# EAGLE board le_grand_strum_stencil (EAGLE 6.6.0)
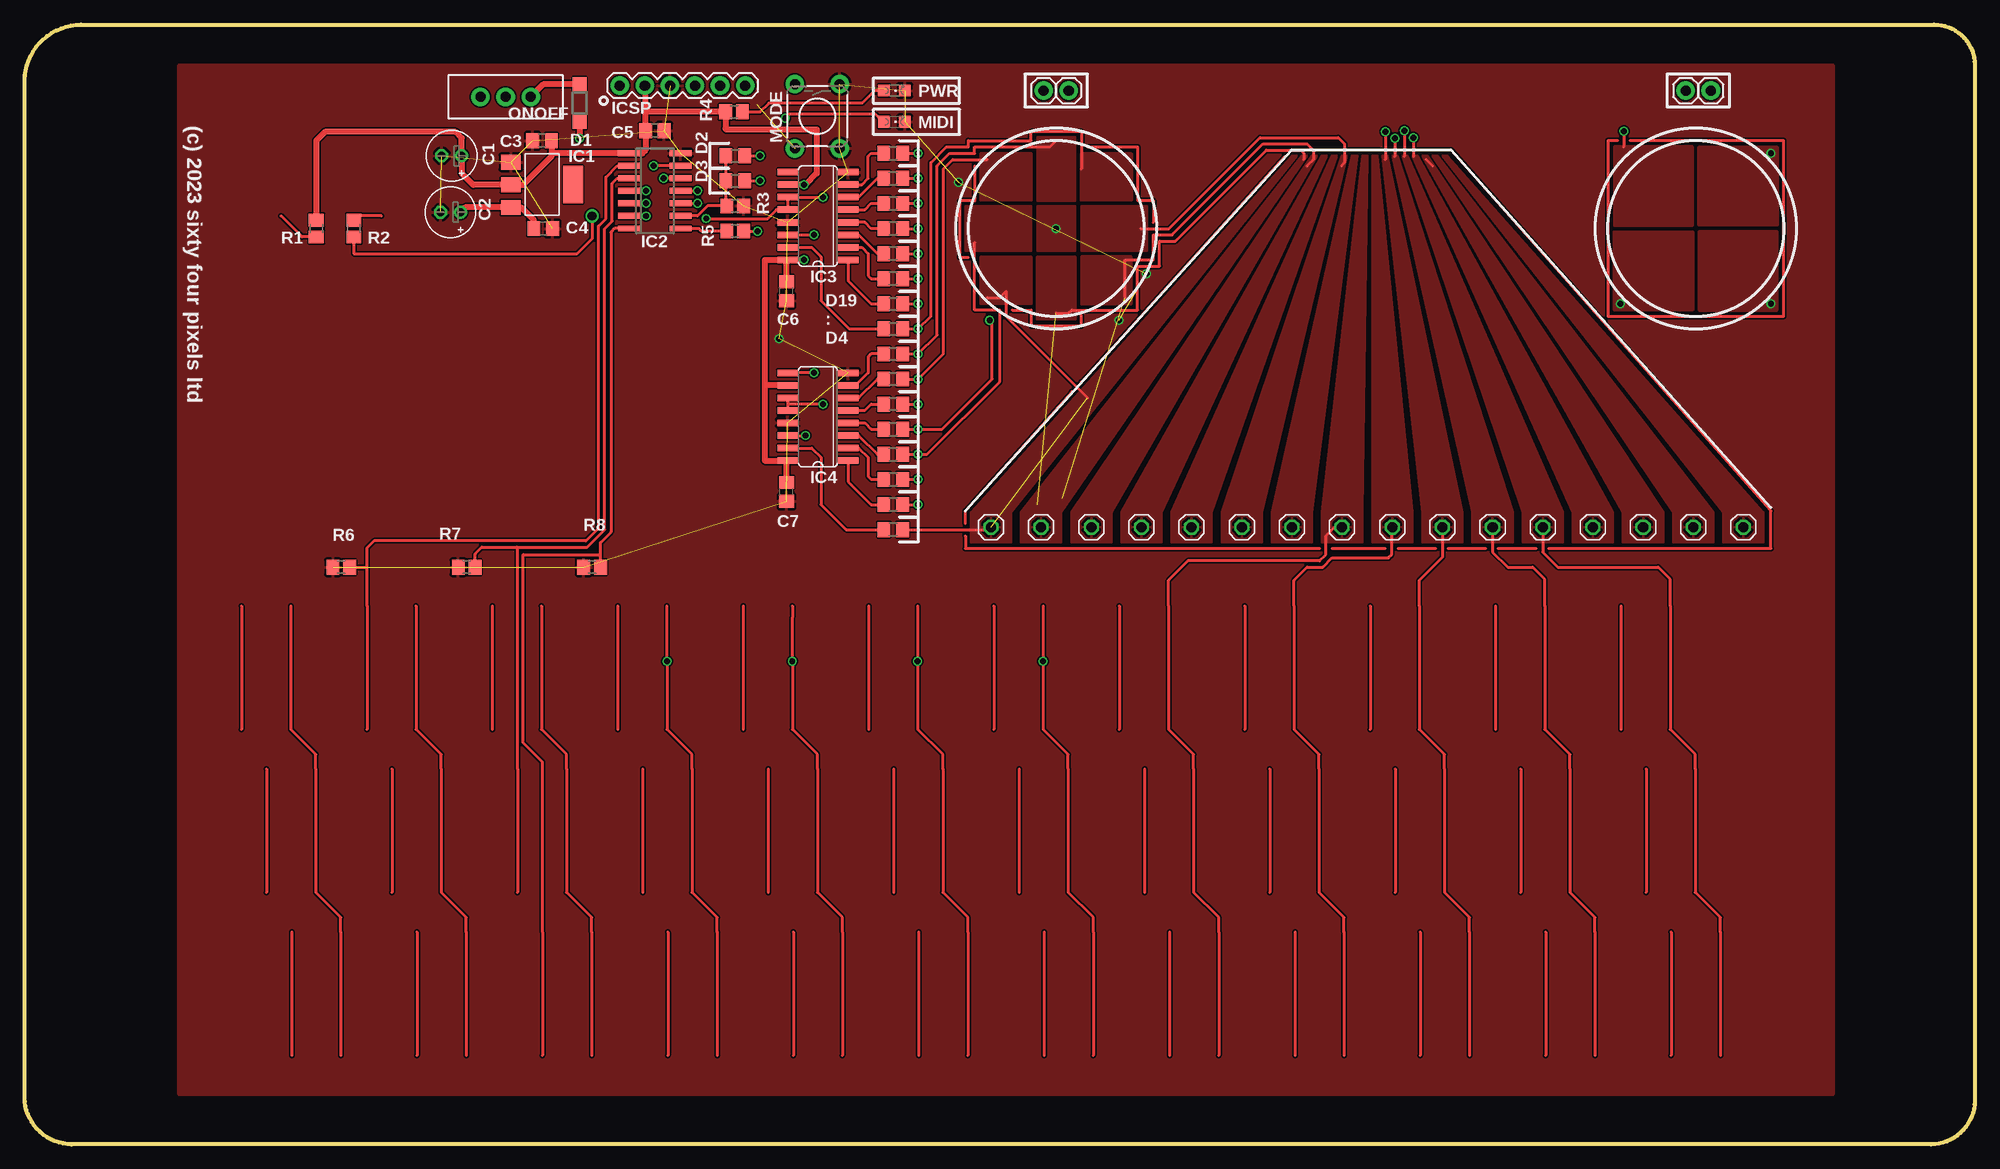
[diagram p0: board, top side]
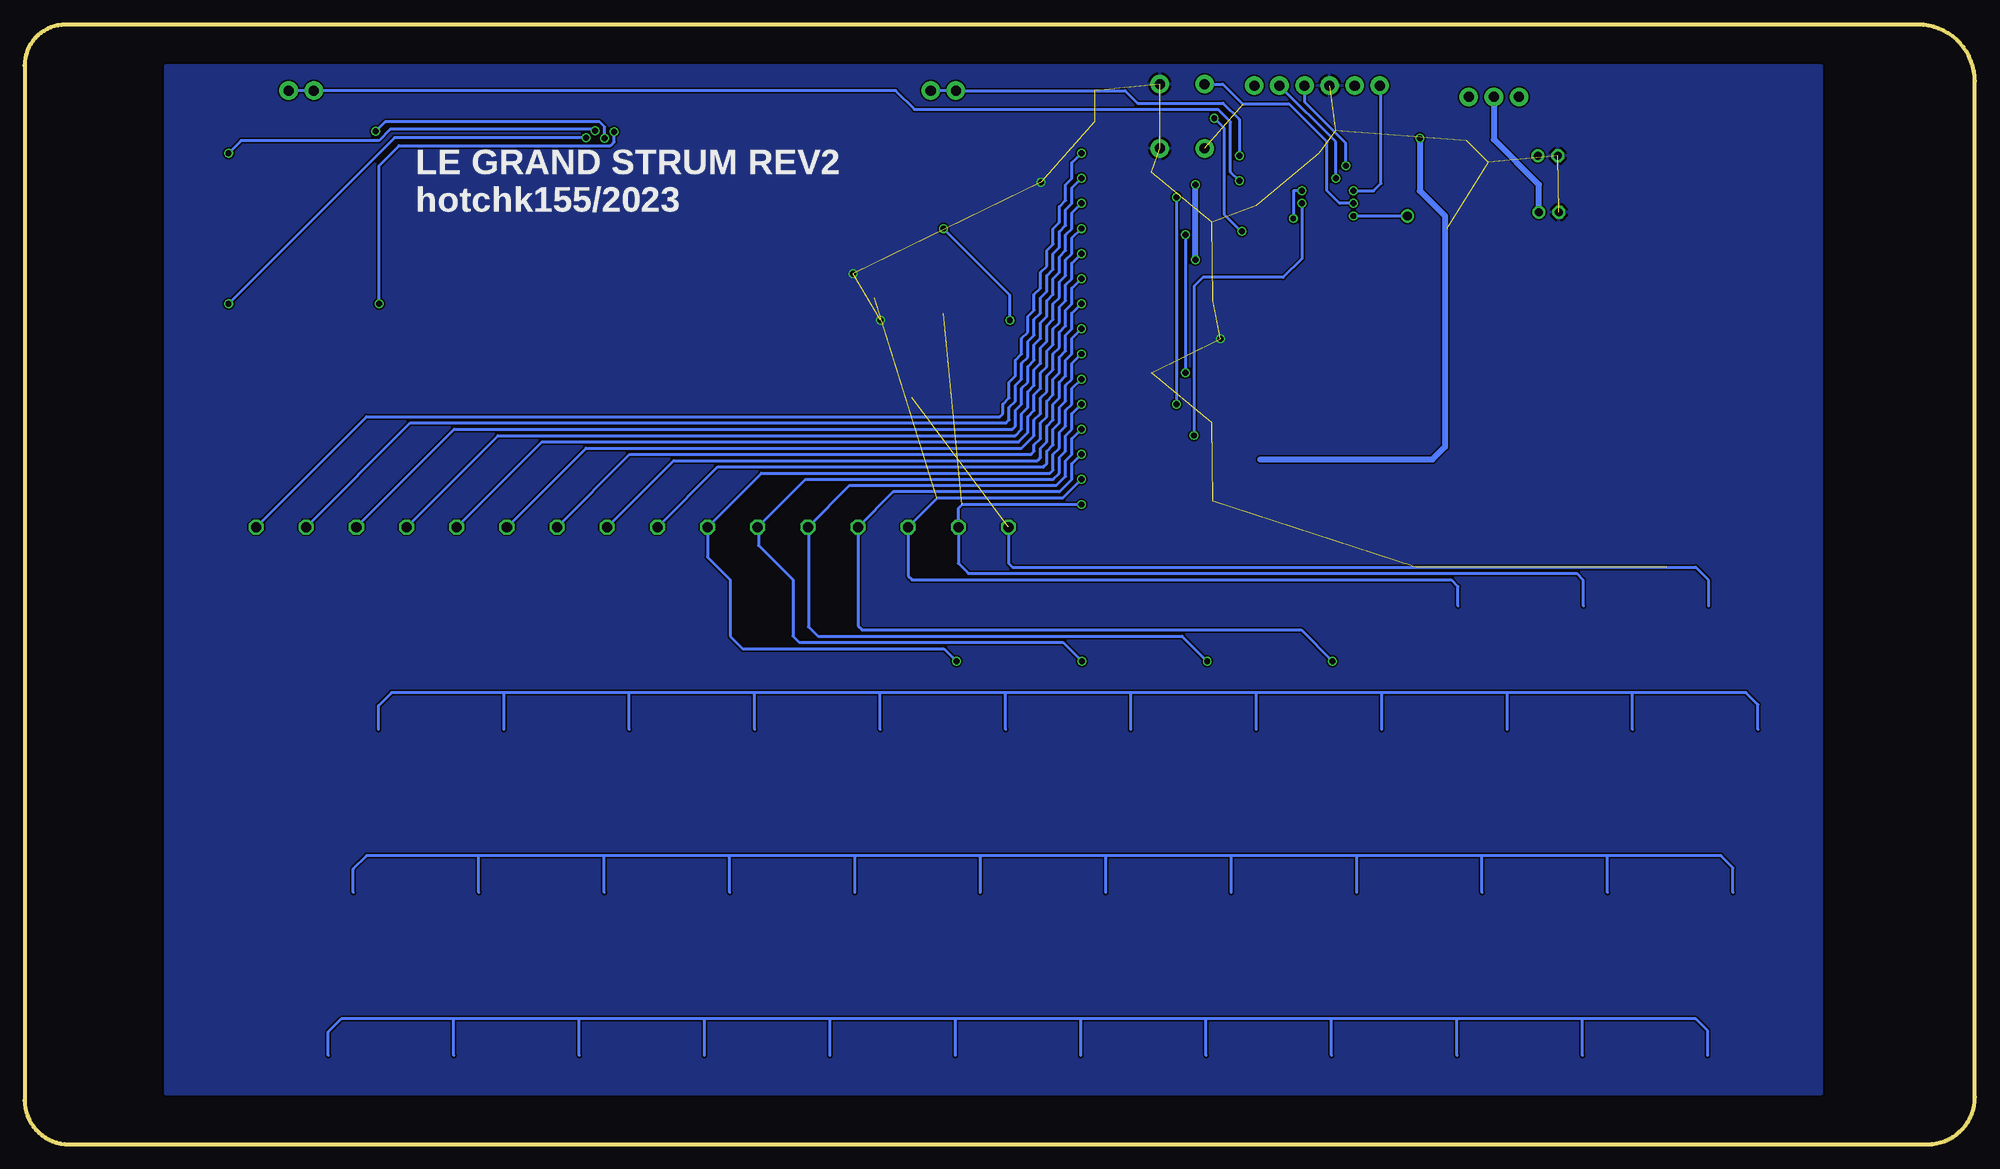
[diagram p1: board, bottom side, seen from below]

Size 197.49 x 113.35 mm. Coordinates in mm from the lower left corner, seen from the top.
Outline: 5.72,113.35 193.36,113.35 arc-90 197.49,109.22 197.49,4.45 arc-90 193.04,0 4.76,0 arc-90 0,4.76 0,107.63 arc-90 5.72,113.35
Copper layers (1*16): Top 0.035mm / dielectric 1.5mm / Bottom 0.035mm
Design rules "hackvana": minimum track width 6mil, minimum drill 0.3mm, track to track 6mil, track to pad 9mil, pad to pad 6mil, via to via 6mil, smd to smd 0mil, copper to edge 6mil, drill to drill 6mil, minimum pad ring 10mil, minimum via ring 6mil, stop-mask expansion 2mil, vias tented up to drill 100mil, thermal gap 10mil

## Footprints (pad centres in the part's own frame; a part is rotated, then mirrored left to right if it is on the bottom)
1X01 = drill 1.016 octagon: 1 0,0
E2-5 = drill 0.813 pad 1.27: + -1.016,0 | drill 0.813 pad 1.27 octagon: - 1.016,0
C0805 = smd 1.3 x 1.5: 1 -0.95,0; 2 0.95,0
SOD123 = smd 1.4 x 1.4: A 1.9,0; C -1.9,0
D0805 = smd 1.3 x 1.5: A -0.95,0; K 0.95,0
SOT223 = smd 1.499 x 2.007: 1 -2.261,-3.15; 2 0.025,-3.15; 3 2.311,-3.15 | smd 3.81 x 2.007: 4 0,3.15
SO14 = smd 0.6 x 2.2: 1 -3.81,-2.6; 2 -2.54,-2.6; 3 -1.27,-2.6; 4 0,-2.6; 5 1.27,-2.6; 6 2.54,-2.6; 7 3.81,-2.6; 8 3.81,2.6; 9 2.54,2.6; 10 1.27,2.6; 11 0,2.6; 12 -1.27,2.6; 13 -2.54,2.6; 14 -3.81,2.6
SO16 = smd 0.66 x 2.032: 1 -4.445,-3.073; 2 -3.175,-3.073; 3 -1.905,-3.073; 4 -0.635,-3.073; 5 0.635,-3.073; 6 1.905,-3.073; 7 3.175,-3.073; 8 4.445,-3.073; 9 4.445,3.073; 10 3.175,3.073; 11 1.905,3.073; 12 0.635,3.073; 13 -0.635,3.073; 14 -1.905,3.073; 15 -3.175,3.073; 16 -4.445,3.073
1X06 = drill 1.016 pad 1.88: 1 0,0; 2 2.54,0; 3 5.08,0; 4 7.62,0; 5 10.16,0; 6 12.7,0
CHIPLED_0805 = smd 1.2 x 1.2: A 0,-1.05; C 0,1.05
TACTILE-PTH = drill 1.016 pad 1.88: 1 -3.251,2.261; 2 3.251,2.261; 3 -3.251,-2.261; 4 3.251,-2.261
SWITCH-SPDT = drill 1.016 pad 1.88: 1 0,2.54; 2 0,0; 3 0,-2.54
R0805 = smd 1.3 x 1.5: 1 -0.85,0; 2 0.85,0
1X01' = drill 1.016 pad 1.88: 1 0,0

## Placement (x,y rotation side)
1  [1X01]  97.85,62.48 0 top
2  [1X01]  102.93,62.48 0 top
3  [1X01]  108.01,62.48 0 top
4  [1X01]  113.09,62.48 0 top
5  [1X01]  118.17,62.48 0 top
6  [1X01]  123.25,62.48 0 top
7  [1X01]  128.33,62.48 0 top
8  [1X01]  133.41,62.48 0 top
9  [1X01]  138.49,62.48 0 top
10  [1X01]  143.57,62.48 0 top
11  [1X01]  148.65,62.48 0 top
12  [1X01]  153.73,62.48 0 top
13  [1X01]  158.81,62.48 0 top
14  [1X01]  163.89,62.48 0 top
15  [1X01]  168.97,62.48 0 top
16  [1X01]  174.05,62.48 0 top
C1  [E2-5]  43.24,100.08 180 top
C2  [E2-5]  43.12,94.36 180 top
C3  [C0805]  52.39,101.6 180 top
C4  [C0805]  52.51,92.71 180 top
C5  [C0805]  63.82,102.62 180 top
C6  [C0805]  77.15,86.36 90 top
C7  [C0805]  77.15,66.04 90 top
D1  MBR0520LT  [SOD123]  56.2,105.41 270 top
D2  [D0805]  71.95,100.08 180 top
D3  [D0805]  71.95,97.54 180 top
D4  [D0805]  87.95,62.23 0 top
D5  [D0805]  87.95,64.77 0 top
D6  [D0805]  87.95,67.31 0 top
D7  [D0805]  87.95,69.85 0 top
D8  [D0805]  87.95,72.39 0 top
D9  [D0805]  87.95,74.93 0 top
D10  [D0805]  87.95,77.47 0 top
D11  [D0805]  87.95,80.01 0 top
D12  [D0805]  87.95,82.55 0 top
D13  [D0805]  87.95,85.09 0 top
D14  [D0805]  87.95,87.63 0 top
D15  [D0805]  87.95,90.17 0 top
D16  [D0805]  87.95,92.71 0 top
D17  [D0805]  87.95,95.25 0 top
D18  [D0805]  87.95,97.79 0 top
D19  [D0805]  87.95,100.33 0 top
IC1  REG1117  [SOT223]  52.39,97.16 270 top
IC2  PIC16F1825SO14  [SO14]  63.82,96.53 270 top
IC3  74HC595D  [SO16]  80.33,93.98 90 top
IC4  74HC595D  [SO16]  80.33,73.66 90 top
ICSP  [1X06]  60.26,107.19 0 top
MIDI  [CHIPLED_0805]  88.07,103.51 270 top
MODE  [TACTILE-PTH]  80.26,104.08 270 top
ONOFF  [SWITCH-SPDT]  48.7,106.05 270 top
PWR  [CHIPLED_0805]  88.07,106.68 270 top
R1  220r  [R0805]  29.53,92.71 270 top
R2  220r  [R0805]  33.34,92.71 270 top
R3  10k  [R0805]  71.95,95 180 top
R4  1k  [R0805]  71.82,104.52 0 top
R5  1k  [R0805]  71.95,92.46 180 top
R6  10k  [R0805]  32.07,58.42 0 top
R7  10k  [R0805]  44.77,58.42 0 top
R8  10k  [R0805]  57.47,58.42 0 top
STYLUS  M01PTH  [1X01']  168.21,106.68 0 top
STYLUS1  M01PTH  [1X01']  170.75,106.68 0 top
STYLUS2  M01PTH  [1X01']  105.73,106.68 0 top
STYLUS3  M01PTH  [1X01']  103.19,106.68 0 top

## Library data of the parts
1-16 = pinhead
C1-C7 = rcl
D1 = diode
D2-D19 = jason_eagle6
IC1 = burr-brown; MPN: REG1117; OC_FARNELL: 1097566; OC_NEWARK: 14P6981
IC2 = jasons_stuff
IC3 IC4 = 74xx-eu
ICSP MODE ONOFF STYLUS STYLUS1-STYLUS3 = SparkFun
MIDI PWR = led
R1-R8 = resistor

## Nets
CARRY: IC3.14 IC4.9
GND: C1.- C2.- C3.2 C4.1 C5.1 C6.1 C7.1 IC1.1 IC2.14 IC3.8 IC3.13 IC4.8 IC4.13 ICSP.3 MIDI.C MODE.1 MODE.2 PWR.C R3.1 R6.1 R7.1 R8.1
LINE1: 1.1 D4.K
LINE2: 2.1 D5.K
LINE3: 3.1 D6.K
LINE4: 4.1 D7.K
LINE5: 5.1 D8.K
LINE6: 6.1 D9.K
LINE7: 7.1 D10.K
LINE8: 8.1 D11.K
LINE9: 9.1 D12.K
LINE10: 10.1 D13.K
LINE11: 11.1 D14.K
LINE12: 12.1 D15.K
LINE13: 13.1 D16.K
LINE14: 14.1 D17.K
LINE15: 15.1 D18.K
LINE16: 16.1 D19.K
N$1: PWR.A R4.2
N$2: D1.A
N$3: D1.C ONOFF.1
N$5: D4.A IC4.15
N$6: D5.A IC4.1
N$7: D6.A IC4.2
N$8: D7.A IC4.3
N$9: D8.A IC4.4
N$10: D9.A IC4.5
N$11: D10.A IC4.6
N$12: MIDI.A R5.1
N$13: D11.A IC4.7
N$14: D12.A IC3.15
N$15: D13.A IC3.1
N$16: D14.A IC3.2
N$17: D15.A IC3.3
N$18: D16.A IC3.4
N$19: D17.A IC3.5
N$20: D18.A IC3.6
N$21: D19.A IC3.7
N$24: D2.A STYLUS2.1 STYLUS3.1
N$25: D3.A STYLUS1.1 STYLUS.1
N$44: R2.1
N$48: R1.2
N$59: C2.+ C4.2 IC1.3 ONOFF.2
RA0: IC2.13 ICSP.4
RA1: IC2.12 ICSP.5
RA2: IC2.11 IC3.11 IC3.12 IC4.11 IC4.12
RA3: IC2.4 ICSP.1
RA4: IC2.3 R7.2
RA5: IC2.2 R6.2
RC0: IC2.10 IC4.14
RC1: D2.K D3.K IC2.9 R3.2
RC2: IC2.8 R5.2
RC3: IC2.7 R8.2
RC4: IC2.6 R2.2
RC5: IC2.5 MODE.3 MODE.4
VCC: C1.+ C3.1 C5.2 C6.2 C7.2 IC1.2 IC2.1 IC3.10 IC3.16 IC4.10 IC4.16 ICSP.2 R1.1 R4.1

## Tracks (layer width: path | path; a pad name or v marks a point on that pad's centre or on a via)
CARRY  (via drill 0.6)
  Top 0.305: IC3.14 v79.95,92.08 | v79.95,78.11 IC4.9
  Bottom 0.305: v79.95,92.08 v79.95,78.11
GND  (via drill 0.6)  (25 unrouted)
  other vias: 110.81,83.44 113.6,88.14 76.39,81.53 94.55,97.41
  pour Top: 15.56,109.22 15.56,5.08 183.2,5.08 183.2,109.22
  pour Bottom: 15.56,109.22 15.56,5.08 183.2,5.08 183.2,109.22
LINE1  (2 unrouted)
  Top 0.305: D4.K 97.6,62.23 1.1 | 97.47,85.73 98.74,85.73 99.38,86.36 99.38,83.82 107.63,75.56 | 26.94,54.51 26.94,42.01 29.48,39.47 29.48,38 29.48,25.5 32.02,22.96 32.02,21.49 32.02,8.99
  Bottom 0.305: 1.1 97.85,58.8 97.47,58.42 28.26,58.42 26.94,57.1 26.94,54.51
  pour Top: 95.82,64.01 95.82,60.96 99.89,60.96 99.89,64.01 128.84,100.08 128.33,100.08
  pour Top: 96.84,89.85 101.92,89.85 101.92,85.09 96.84,85.09
LINE2  (via drill 0.6)  (2 unrouted)
  Top 0.305: D5.K v90.49,64.77 | 129.54,99.7 129.54,100.33 129.22,100.65 125.73,100.65 116.52,91.44 114.93,91.44 114.93,88.9 112.71,88.9 112.71,84.45 106.04,84.45 105.73,84.14 104.46,84.14 | 39.64,54.51 39.64,42.01 42.18,39.47 42.18,38 42.18,25.5 44.72,22.96 44.72,21.49 44.72,8.99
  Bottom 0.305: v90.49,64.77 102.55,64.77 102.93,64.39 2.1 102.93,58.8 101.92,57.78 40.32,57.78 39.69,57.15 39.69,54.56 39.64,54.51
  pour Top: 100.9,64.01 100.9,60.96 104.97,60.96 104.97,64.01 129.86,100.08 129.35,100.08
  pour Top: 102.55,89.85 106.36,89.85 106.36,83.5 102.55,83.5
LINE3  (via drill 0.6)  (2 unrouted)
  Top 0.305: D6.K v90.49,67.31 | 129.86,99.06 130.49,99.7 130.49,100.65 129.86,101.28 125.41,101.28 116.2,92.08 114.3,92.08 114.3,89.54 111.44,89.54 111.44,85.73 | 57.42,8.99 57.42,21.49 57.42,22.96 54.88,25.5 54.88,38 54.88,39.47 52.34,42.01 52.34,54.51
  Bottom 0.305: v90.49,67.31 92.39,65.41 105.09,65.41 3.1 108.01,57.53 107.63,57.15 53.02,57.15 52.34,56.46 52.34,54.51
  pour Top: 105.98,64.01 105.98,60.96 110.05,60.96 110.05,64.01 130.87,100.08 130.37,100.08
  pour Top: 107,89.85 107,85.09 112.08,85.09 112.08,89.85
LINE4  (via drill 0.6)
  Top 0.305: D7.K v90.49,69.85 91.38,69.85 98.74,77.22 98.74,84.45 96.2,84.45 96.2,91.31 | 70.12,8.99 70.12,21.49 70.12,22.96 67.58,25.5 67.58,38 67.58,39.47 65.04,42.01 v65.04,48.89 65.04,54.51
  Bottom 0.305: v90.49,69.85 91.44,68.9 91.44,67.31 92.71,66.04 109.54,66.04 4.1 113.09,52.45 112.71,52.07 68.21,52.07 v65.04,48.89
  pour Top: 111.06,64.01 111.06,60.96 115.13,60.96 115.13,64.01 131.89,100.08 131.38,100.08
  pour Top: 101.92,90.49 101.92,94.93 95.25,94.93 95.25,90.49
LINE5  (via drill 0.6)
  Top 0.305: D8.K v90.49,72.39 92.9,72.39 97.98,77.47 97.98,83.19 v97.73,83.44 | 77.74,54.51 77.74,53.34 v77.74,48.89 77.74,42.01 80.28,39.47 80.28,38 80.28,25.5 82.82,22.96 82.82,21.49 82.82,8.99
  Bottom 0.305: v90.49,72.39 91.44,71.44 91.44,69.85 92.07,69.22 92.07,67.63 93.03,66.67 113.98,66.67 5.1 118.11,62.42 118.11,52.39 117.16,51.43 80.28,51.43 v77.74,48.89 | v97.73,83.44 97.73,85.98 v104.46,92.71
  pour Top: 116.14,64.01 116.14,60.96 120.21,60.96 120.21,64.01 132.91,100.08 132.4,100.08
  pour Top: 102.55,94.93 102.55,90.49 106.36,90.49 106.36,94.93
LINE6  (via drill 0.6)
  Top 0.305: D9.K v90.49,74.93 | 113.03,92.71 115.89,92.71 125.09,101.92 133.03,101.92 133.67,101.28 133.67,99.38 133.35,99.06 | 90.44,54.51 v90.44,48.89 90.44,42.01 92.98,39.47 92.98,38 92.98,25.5 95.52,22.96 95.52,21.49 95.52,8.99
  Bottom 0.305: v90.49,74.93 91.44,73.98 91.44,72.39 92.07,71.76 92.07,70.17 92.71,69.53 92.71,67.95 93.34,67.31 118.43,67.31 6.1 123.19,62.42 123.19,60.64 119.7,57.15 119.7,51.43 119.06,50.8 92.34,50.8 v90.44,48.89
  pour Top: 121.22,64.01 121.22,60.96 125.29,60.96 125.29,64.01 133.92,100.08 133.41,100.08
  pour Top: 107,94.93 107,90.49 113.67,90.49 113.67,94.93
LINE7  (via drill 0.6)
  Top 0.305: D10.K v90.49,77.47 93.03,80.01 93.03,98.74 93.98,99.7 97.47,99.7 | 103.14,54.51 v103.14,48.89 103.14,43.18 103.14,42.01 105.68,39.47 105.68,38 105.68,25.5 108.22,22.96 108.22,21.49 108.22,8.99
  Bottom 0.305: v90.49,77.47 91.44,76.52 91.44,74.93 92.07,74.3 92.07,72.71 92.71,72.07 92.71,70.48 93.34,69.85 93.34,68.26 93.66,67.95 122.87,67.95 7.1 128.33,59.44 126.05,57.15 126.05,51.43 124.78,50.16 104.41,50.16 v103.14,48.89
  pour Top: 126.3,64.01 126.3,60.96 130.37,60.96 130.37,64.01 134.94,100.08 134.43,100.08
  pour Top: 101.92,95.57 96.84,95.57 96.84,100.33 101.92,100.33
LINE8  (via drill 0.6)
  Top 0.305: D11.K v90.49,80.01 92.39,81.92 92.39,99.06 93.66,100.33 96.2,100.33 96.2,100.97 103.82,100.97 104.46,101.6 | 120.92,8.99 120.92,21.49 120.92,22.96 118.38,25.5 118.38,38 118.38,39.47 115.84,42.01 115.84,54.51 115.84,57.1 117.79,59.05 131.13,59.05 131.76,59.69 131.76,61.59 133.03,62.86
  Top 0.406: 8.1 133.41,61.98
  Bottom 0.305: 8.1 127.32,68.58 94.3,68.58 93.98,68.9 93.98,70.17 93.34,70.8 93.34,72.39 92.71,73.03 92.71,74.61 92.07,75.25 92.07,76.84 91.44,77.47 91.44,79.06 v90.49,80.01
  pour Top: 131.38,64.01 131.38,60.96 135.45,60.96 135.45,64.01 135.95,100.08 135.45,100.08
  pour Top: 102.55,95.57 106.36,95.57 106.36,101.92 102.55,101.92
LINE9  (via drill 0.6)
  Top 0.305: D12.K v90.49,82.55 91.76,83.82 91.76,99.38 93.34,100.97 95.57,100.97 95.57,101.6 101.92,101.6 101.92,102.55 107,102.55 107,98.74 | 133.62,8.99 133.62,21.49 133.62,22.96 131.08,25.5 131.08,38 131.08,39.47 128.54,42.01 128.54,54.51 128.54,57.1 129.86,58.42 131.45,58.42 132.4,59.37 138.11,59.37 138.43,59.69 138.43,62.42 9.1
  Bottom 0.305: 9.1 131.76,69.22 94.93,69.22 94.62,69.53 94.62,70.48 93.98,71.12 93.98,72.71 93.34,73.34 93.34,74.93 92.71,75.56 92.71,77.15 92.07,77.79 92.07,79.38 91.44,80.01 91.44,81.6 v90.49,82.55
  pour Top: 136.46,100.08 136.46,60.96 140.53,60.96 140.53,64.01 136.97,100.08
  pour Top: 107,95.57 107,100.33 112.08,100.33 112.08,95.57
LINE10  (via drill 0.6)
  Top 0.305: D13.K v90.49,85.09 | v137.79,102.49 137.79,99.7 | 146.32,8.99 146.32,21.49 146.32,22.96 143.78,25.5 143.78,38 143.78,39.47 141.24,42.01 141.24,54.51 141.24,57.1 143.57,59.44 10.1
  Bottom 0.305: 10.1 136.21,69.85 95.57,69.85 95.25,70.17 95.25,70.8 94.62,71.44 94.62,73.03 93.98,73.66 93.98,75.25 93.34,75.88 93.34,77.47 92.71,78.11 92.71,79.69 92.07,80.33 92.07,81.92 91.44,82.55 91.44,84.14 v90.49,85.09 | v161.61,85.09 161.61,99.06 159.58,101.09 138.18,101.09 137.79,101.47 v137.79,102.49
  pour Top: 141.54,64.01 141.54,60.96 145.61,60.96 145.61,64.01 137.99,100.08 137.48,100.08
  pour Top: 160.97,92.39 168.91,92.39 168.91,84.45 160.97,84.45
LINE11  (via drill 0.6)
  Top 0.305: D14.K v90.49,87.63 | v138.75,101.85 138.75,100.01 | v161.93,102.55 161.93,100.97 | 159.02,8.99 159.02,21.49 159.02,22.96 156.48,25.5 156.48,38 156.48,39.47 153.94,42.01 153.94,54.51 153.94,57.2 152.72,58.42 150.18,58.42 148.65,59.94 11.1
  Bottom 0.305: 11.1 140.65,70.48 96.52,70.48 95.25,71.76 95.25,73.34 94.62,73.98 94.62,75.56 93.98,76.2 93.98,77.79 93.34,78.42 93.34,80.01 92.71,80.65 92.71,82.23 92.07,82.87 92.07,84.45 91.44,85.09 91.44,86.68 v90.49,87.63 | v138.75,101.85 138.75,103 139.26,103.51 160.97,103.51 v161.93,102.55
  pour Top: 146.62,64.01 146.62,60.96 150.69,60.96 150.69,64.01 139,100.08 138.49,100.08
  pour Top: 160.97,93.03 168.91,93.03 168.91,100.97 160.97,100.97
LINE12  (via drill 0.6)
  Top 0.305: D15.K v90.49,90.17 | v139.7,102.62 139.7,100.01 | 171.72,8.99 171.72,21.49 171.72,22.96 169.18,25.5 169.18,38 169.18,39.47 166.64,42.01 166.64,54.51 166.64,57.2 165.42,58.42 155.26,58.42 153.73,59.94 12.1
  Bottom 0.305: 12.1 145.1,71.12 96.84,71.12 95.89,72.07 95.89,73.66 95.25,74.3 95.25,75.88 94.62,76.52 94.62,78.11 93.98,78.74 93.98,80.33 93.34,80.96 93.34,82.55 92.71,83.19 92.71,84.77 92.07,85.41 92.07,87 91.44,87.63 91.44,89.22 v90.49,90.17 | v176.85,100.33 175.58,101.6 161.61,101.6 160.46,102.74 139.76,102.74 139.7,102.68 v139.7,102.62
  pour Top: 151.7,64.01 151.7,60.96 155.77,60.96 155.77,64.01 140.02,100.08 139.51,100.08
  pour Top: 169.55,93.03 169.55,100.97 177.48,100.97 177.48,93.03
LINE13  (via drill 0.6)
  Top 0.305: D16.K v90.49,92.71 | v140.65,101.92 140.65,100.01
  Bottom 0.305: 13.1 149.54,71.76 97.15,71.76 96.52,72.39 96.52,73.98 95.89,74.61 95.89,76.2 95.25,76.84 95.25,78.42 94.62,79.06 94.62,80.65 93.98,81.28 93.98,82.87 93.34,83.5 93.34,85.09 92.71,85.73 92.71,87.31 92.07,87.95 92.07,89.54 91.44,90.17 91.44,91.76 v90.49,92.71 | v176.85,85.09 160.02,101.92 v140.65,101.92
  pour Top: 156.78,64.01 156.78,60.96 160.85,60.96 160.85,64.01 141.03,100.08 140.53,100.08
  pour Top: 169.55,92.39 169.55,84.45 177.48,84.45 177.48,92.39
LINE14  (via drill 0.6)
  Top 0.305: D17.K v90.49,95.25 | 141.92,99.7 142.56,99.06
  Bottom 0.305: 14.1 153.99,72.39 97.47,72.39 97.15,72.71 97.15,74.3 96.52,74.93 96.52,76.52 95.89,77.15 95.89,78.74 95.25,79.38 95.25,80.96 94.62,81.6 94.62,83.19 93.98,83.82 93.98,85.41 93.34,86.04 93.34,87.63 92.71,88.27 92.71,89.85 92.07,90.49 92.07,92.08 91.44,92.71 91.44,94.3 v90.49,95.25
  pour Top: 161.86,64.01 161.86,60.96 165.93,60.96 165.93,64.01 142.05,100.08 141.54,100.08
LINE15  (via drill 0.6)
  Top 0.305: D18.K v90.49,97.79
  Bottom 0.305: 15.1 158.43,73.03 98.11,73.03 97.79,73.34 97.79,74.61 97.15,75.25 97.15,76.84 96.52,77.47 96.52,79.06 95.89,79.69 95.89,81.28 95.25,81.92 95.25,83.5 94.62,84.14 94.62,85.73 93.98,86.36 93.98,87.95 93.34,88.58 93.34,90.17 92.71,90.81 92.71,92.39 92.07,93.03 92.07,94.62 91.44,95.25 91.44,96.84 v90.49,97.79
  pour Top: 166.94,64.01 166.94,60.96 171.01,60.96 171.01,64.01 143.07,100.08 142.56,100.08
LINE16  (via drill 0.6)
  Top 0.305: D19.K v90.49,100.33
  Bottom 0.305: 16.1 162.88,73.66 98.74,73.66 98.43,73.98 98.43,74.93 97.79,75.56 97.79,77.15 97.15,77.79 97.15,79.38 96.52,80.01 96.52,81.6 95.89,82.23 95.89,83.82 95.25,84.45 95.25,86.04 94.62,86.68 94.62,88.27 93.98,88.9 93.98,90.49 93.34,91.12 93.34,92.71 92.71,93.34 92.71,94.93 92.07,95.57 92.07,97.16 91.44,97.79 91.44,99.38 v90.49,100.33
  pour Top: 172.02,64.01 172.02,60.96 176.09,60.96 176.09,64.01 144.08,100.08 143.57,100.08
N$1
  Top 0.305: PWR.A 86.04,106.68 84.77,105.41 75.37,105.41 74.49,104.52 R4.2
N$2  (via drill 0.6)
  Top 0.61: D1.A v56.2,101.85
  Bottom 0.61: 72.38,69.33 72.37,69.34 54.93,69.34 53.66,70.61 53.66,93.98 56.2,96.52 v56.2,101.85
N$3
  Top 0.61: D1.C 52.51,107.31 ONOFF.1
N$5
  Top 0.305: IC4.15 79.69,70.48 80.65,69.53 80.65,64.77 83.18,62.23 D4.A
N$6
  Top 0.305: IC4.1 83.4,67.09 85.73,64.77 D5.A
N$7
  Top 0.305: IC4.2 84.45,70.48 85.41,69.53 85.41,67.63 85.73,67.31 D6.A
N$8
  Top 0.305: IC4.3 84.45,71.76 86.36,69.85 D7.A
N$9
  Top 0.305: IC4.4 85.09,73.03 85.73,72.39 D8.A
N$10
  Top 0.305: IC4.5 85.09,74.3 85.73,74.93 D9.A
N$11
  Top 0.305: IC4.6 84.45,75.56 86.36,77.47 D10.A
N$12  (via drill 0.6)
  Top 0.305: 86.8,103.51 MIDI.A 86.93,103.51 86.17,104.27 77.41,104.27 v77.03,103.89 | R5.1 v74.23,92.46
  Bottom 0.305: v74.23,92.46 74.23,92.33 76.01,94.11 76.01,102.87 v77.03,103.89
N$13
  Top 0.305: D11.A 85.73,80.01 85.41,79.69 85.41,78.11 84.14,76.84 IC4.7
N$14
  Top 0.305: IC3.15 79.69,90.81 80.65,89.85 80.65,85.41 83.5,82.55 D12.A
N$15
  Top 0.305: IC3.1 83.4,87.41 85.73,85.09 D13.A
N$16
  Top 0.305: IC3.2 84.77,90.81 85.41,90.17 85.41,87.95 85.73,87.63 D14.A
N$17
  Top 0.305: D15.A 86.36,90.17 84.45,92.08 IC3.3
N$18
  Top 0.305: D16.A 85.73,92.71 85.09,93.34 IC3.4
N$19
  Top 0.305: IC3.5 85.09,94.62 85.73,95.25 D17.A
N$20
  Top 0.305: IC3.6 84.45,95.89 86.36,97.79 D18.A
N$21
  Top 0.305: IC3.7 84.77,97.16 85.41,97.79 85.41,100.01 85.73,100.33 D19.A
N$22
  Top 0.305: 96.2,99.06 96.2,95.5 94.68,95.5 94.68,89.79 95.57,89.79
N$23
  Top 0.305: 100.01,84.45 101.92,84.45 101.92,82.87 107,82.87 107,83.88
N$24  (via drill 0.6)
  Top 0.305: D2.A v74.49,100.08
  Bottom 0.305: v74.49,100.08 74.49,103.76 76.14,105.41 84.77,105.41 86.04,106.68 STYLUS3.1 STYLUS2.1
N$25  (via drill 0.6)
  Top 0.305: D3.A v74.49,97.54
  Bottom 0.305: STYLUS1.1 STYLUS.1 109.28,106.68 107.38,104.78 76.64,104.78 75.37,103.51 75.37,98.43 v74.49,97.54
N$26
  Top 0.305: 107.63,100.97 112.71,100.97 112.71,95.57 114.3,95.57 114.3,93.34
N$27
  Top 0.305: 161.29,101.6 160.34,101.6 160.34,83.82 178.12,83.82 178.12,101.6 162.56,101.6
N$28
  Top 0.305: 95.25,61.59 95.25,60.32 131.13,60.32
N$30
  Top 0.305: 132.4,60.32 137.79,60.32
N$31
  Top 0.305: 139.06,60.32 142.87,60.32
N$32
  Top 0.305: 144.15,60.32 147.96,60.32
N$33
  Top 0.305: 149.22,60.32 153.03,60.32
N$34
  Top 0.305: 154.31,60.32 176.85,60.32 176.85,64.14 144.46,100.65 141.22,100.65
N$35
  Top 0.305: 137.16,100.65 134.3,100.65
N$36
  Top 0.305: 133.03,100.65 131.13,100.65
N$37
  Top 0.305: 95.25,62.86 95.25,64.14 106.04,76.2
N$38
  Top 0.305: 107,77.15 127.64,100.01
N$44
  Top 0.305: 36.13,93.98 33.76,93.98 R2.1
N$48
  Top 0.305: R1.2 28.09,91.86 25.97,93.98
N$59
  Top 0.61: C4.2 51.56,93.53 50.25,94.84 IC1.3 44.62,94.84 C2.+
  Bottom 0.61: C2.+ 44.13,97.16 48.7,101.73 ONOFF.2
RA0  (via drill 0.6)
  Top 0.305: IC2.13 v63.7,99.06 v63.69,99.06
  Bottom 0.305: ICSP.4 67.88,105.54 63.69,101.35 v63.69,99.06
RA1  (via drill 0.6)
  Top 0.305: IC2.12 v64.71,97.8 v64.71,97.79
  Bottom 0.305: v64.71,97.79 64.71,101.47 ICSP.5
RA2  (via drill 0.6)
  Top 0.305: v80.84,95.89 IC3.11 IC3.12 76.14,94.62 75.25,93.73 v69.02,93.73 | IC4.11 77.25,74.93 | 77.25,74.93 IC4.12 | v80.84,74.93 77.25,74.93 | IC2.11 v68.13,96.53 v68.14,96.52
  Bottom 0.305: v68.14,96.52 69.02,96.52 v69.02,93.73 | v80.84,95.89 v80.84,74.93
RA3  (via drill 0.6)
  Top 0.305: IC2.4 v62.92,96.53 v62.93,96.52
  Bottom 0.305: v62.93,96.52 60.9,96.52 60.13,97.28 60.13,107.06 ICSP.1
RA4  (12 unrouted)
  Top 0.305: R7.2 45.62,59.78 46.29,60.45 49.85,60.45 | 49.85,60.45 56.96,60.45 58.74,62.23 58.74,92.71 59.5,93.47 59.5,97.28 60.01,97.79 IC2.3 | 24.5,38 24.5,25.5 | 37.2,38 37.2,25.5 | 49.9,25.5 49.9,38 49.9,60.4 49.85,60.45 | 62.6,38 62.6,25.5 | 75.3,38 75.3,25.5 | 88,38 88,25.5 | 100.7,38 100.7,25.5 | 113.4,38 113.4,25.5 | 126.1,38 126.1,25.5 | 138.8,38 138.8,25.5 | 151.5,38 151.5,25.5 | 164.2,38 164.2,25.5
  Bottom 0.305: 24.5,25.5 24.5,27.99 25.72,29.21 37.15,29.21 | 37.15,29.21 49.85,29.21 | 49.85,29.21 62.55,29.21 | 62.55,29.21 75.25,29.21 | 75.25,29.21 87.95,29.21 | 87.95,29.21 100.65,29.21 | 100.65,29.21 113.35,29.21 | 113.35,29.21 126.05,29.21 | 126.05,29.21 138.75,29.21 | 138.75,29.21 151.45,29.21 | 151.45,29.21 162.88,29.21 164.2,27.89 164.2,25.5 | 151.5,25.5 151.5,29.16 151.45,29.21 | 138.8,25.5 138.8,29.16 138.75,29.21 | 126.1,25.5 126.1,29.16 126.05,29.21 | 113.4,25.5 113.4,29.16 113.35,29.21 | 100.7,25.5 100.7,29.16 100.65,29.21 | 88,25.5 88,29.16 87.95,29.21 | 75.3,25.5 75.3,29.16 75.25,29.21 | 62.6,25.5 62.6,29.16 62.55,29.21 | 49.9,25.5 49.9,29.16 49.85,29.21 | 37.2,25.5 37.2,29.16 37.15,29.21
RA5  (12 unrouted)
  Top 0.305: IC2.2 60.01,99.06 58.86,97.92 58.86,93.73 58.1,92.96 58.1,62.36 56.83,61.09 35.37,61.09 34.66,60.38 34.66,58.42 | 21.96,54.51 21.96,42.01 | 34.66,42.01 34.66,54.51 34.66,58.42 | 47.36,54.51 47.36,42.01 | 60.06,54.51 60.06,42.01 | 72.76,54.51 72.76,42.01 | 85.46,54.51 85.46,42.01 | 98.16,54.51 98.16,42.01 | 110.86,54.51 110.86,42.01 | 123.56,54.51 123.56,42.01 | 136.26,54.51 136.26,42.01 | 148.96,54.51 148.96,42.01 | 161.66,54.51 161.66,42.01 | R6.2 34.66,58.42
  Bottom 0.305: 21.96,42.01 21.96,44.5 23.18,45.72 34.61,45.72 | 34.61,45.72 47.31,45.72 | 47.31,45.72 60.01,45.72 | 60.01,45.72 72.71,45.72 | 72.71,45.72 85.41,45.72 | 85.41,45.72 98.11,45.72 | 98.11,45.72 110.81,45.72 | 110.81,45.72 123.51,45.72 | 123.51,45.72 136.21,45.72 | 136.21,45.72 148.91,45.72 | 148.91,45.72 160.34,45.72 161.66,44.4 161.66,42.01 | 148.96,42.01 148.96,45.67 148.91,45.72 | 136.26,42.01 136.26,45.67 136.21,45.72 | 123.56,42.01 123.56,45.67 123.51,45.72 | 110.86,42.01 110.86,45.67 110.81,45.72 | 98.16,42.01 98.16,45.67 98.11,45.72 | 85.46,42.01 85.46,45.67 85.41,45.72 | 72.76,42.01 72.76,45.67 72.71,45.72 | 60.06,42.01 60.06,45.67 60.01,45.72 | 47.36,42.01 47.36,45.67 47.31,45.72 | 34.66,42.01 34.66,45.67 34.61,45.72
RC0  (via drill 0.6)
  Top 0.305: IC2.10 v68.13,95.26 v68.14,95.25 | IC4.14 v79.06,71.76
  Bottom 0.305: v68.14,95.25 68.14,89.66 70.04,87.76 78.17,87.76 79.06,86.87 v79.06,71.76
RC1
  Top 0.305: IC2.9 68.14,93.98 69.15,95 R3.2 71,95.1 D3.K D2.K
RC2
  Top 0.305: IC2.8 68.26,92.72 68.52,92.46 R5.2
RC3  (12 unrouted)
  Top 0.305: R8.2 58.32,59.69 | 58.32,59.69 58.32,60.92 59.37,61.98 59.37,92.33 59.76,92.72 IC2.7 | 27.04,21.49 27.04,8.99 | 39.74,21.49 39.74,8.99 | 52.44,8.99 52.44,21.49 52.44,38.68 50.48,40.64 50.48,59.69 58.32,59.69 | 65.14,21.49 65.14,8.99 | 77.84,21.49 77.84,8.99 | 90.54,21.49 90.54,8.99 | 103.24,21.49 103.24,8.99 | 115.94,21.49 115.94,8.99 | 128.64,21.49 128.64,8.99 | 141.34,21.49 141.34,8.99 | 154.04,21.49 154.04,8.99 | 166.74,21.49 166.74,8.99
  Bottom 0.305: 27.04,8.99 27.04,11.48 28.26,12.7 39.69,12.7 | 39.69,12.7 52.39,12.7 | 52.39,12.7 65.09,12.7 | 65.09,12.7 77.79,12.7 | 77.79,12.7 90.49,12.7 | 90.49,12.7 103.19,12.7 | 103.19,12.7 115.89,12.7 | 115.89,12.7 128.59,12.7 | 128.59,12.7 141.29,12.7 | 141.29,12.7 153.99,12.7 | 153.99,12.7 165.42,12.7 166.74,11.38 166.74,8.99 | 154.04,8.99 154.04,12.65 153.99,12.7 | 141.34,8.99 141.34,12.65 141.29,12.7 | 128.64,8.99 128.64,12.65 128.59,12.7 | 115.94,8.99 115.94,12.65 115.89,12.7 | 103.24,8.99 103.24,12.65 103.19,12.7 | 90.54,8.99 90.54,12.65 90.49,12.7 | 77.84,8.99 77.84,12.65 77.79,12.7 | 65.14,8.99 65.14,12.65 65.09,12.7 | 52.44,8.99 52.44,12.65 52.39,12.7 | 39.74,8.99 39.74,12.65 39.69,12.7
RC4  (via drill 0.6, 0.9)
  Top 0.305: IC2.6 v62.92,93.98 v62.93,93.98 | R2.2 33.34,90.17 55.94,90.17 57.47,91.69 v57.47,93.98
  Bottom 0.305: v62.93,93.98 v57.47,93.98
RC5  (via drill 0.6)  (1 unrouted)
  Top 0.305: IC2.5 v62.92,95.26 v62.93,95.25
  Bottom 0.305: v62.93,95.25 64.33,95.25 65.6,96.52 65.6,101.47 69.41,105.28 74.1,105.28 76.15,107.33 MODE.3
VCC  (via drill 0.6)
  Top 0.61: 53.34,100.33 C3.1 53.46,101.47 | 53.34,100.33 53.34,100.01 50.46,97.13 IC1.2 45.43,97.13 44.26,98.3 C1.+ 44.26,101.85 43.62,102.49 30.42,102.49 29.53,101.6 R1.1 | ICSP.2 62.8,104.52 | 62.8,104.52 62.8,102.68 C5.2 62.87,100.65 62.55,100.33 IC2.1 53.34,100.33 | C6.2 77.15,89.43 IC3.16 | C7.2 77.15,69.11 IC4.16 74.93,69.22 74.93,76.84 | IC3.16 74.93,89.54 74.93,76.84 | IC4.10 74.93,76.84 | 62.8,104.52 R4.1 70.97,102.83 71.06,102.74 80.2,102.74 80.2,98.3 79.06,97.16 v78.93,97.16 IC3.10 | IC3.16 v78.93,89.54
  Bottom 0.61: v78.93,89.54 v78.93,97.16

## Text on the board
tPlace: (c) 2023 sixty four pixels ltd | D19 / : / D4
bPlace: LE GRAND STRUM REV2 / hotchk155/2023